# Altium PCB PCB1.pcbdoc
Units mil, origin at the board's own origin, x right, y up, seen from the top; angles counter-clockwise.
Board outline 1570.77 x 933.66 mil, 2 copper layers (Top Layer, Bottom Layer); 11 components, 16 nets, 89 pads, 38 vias.
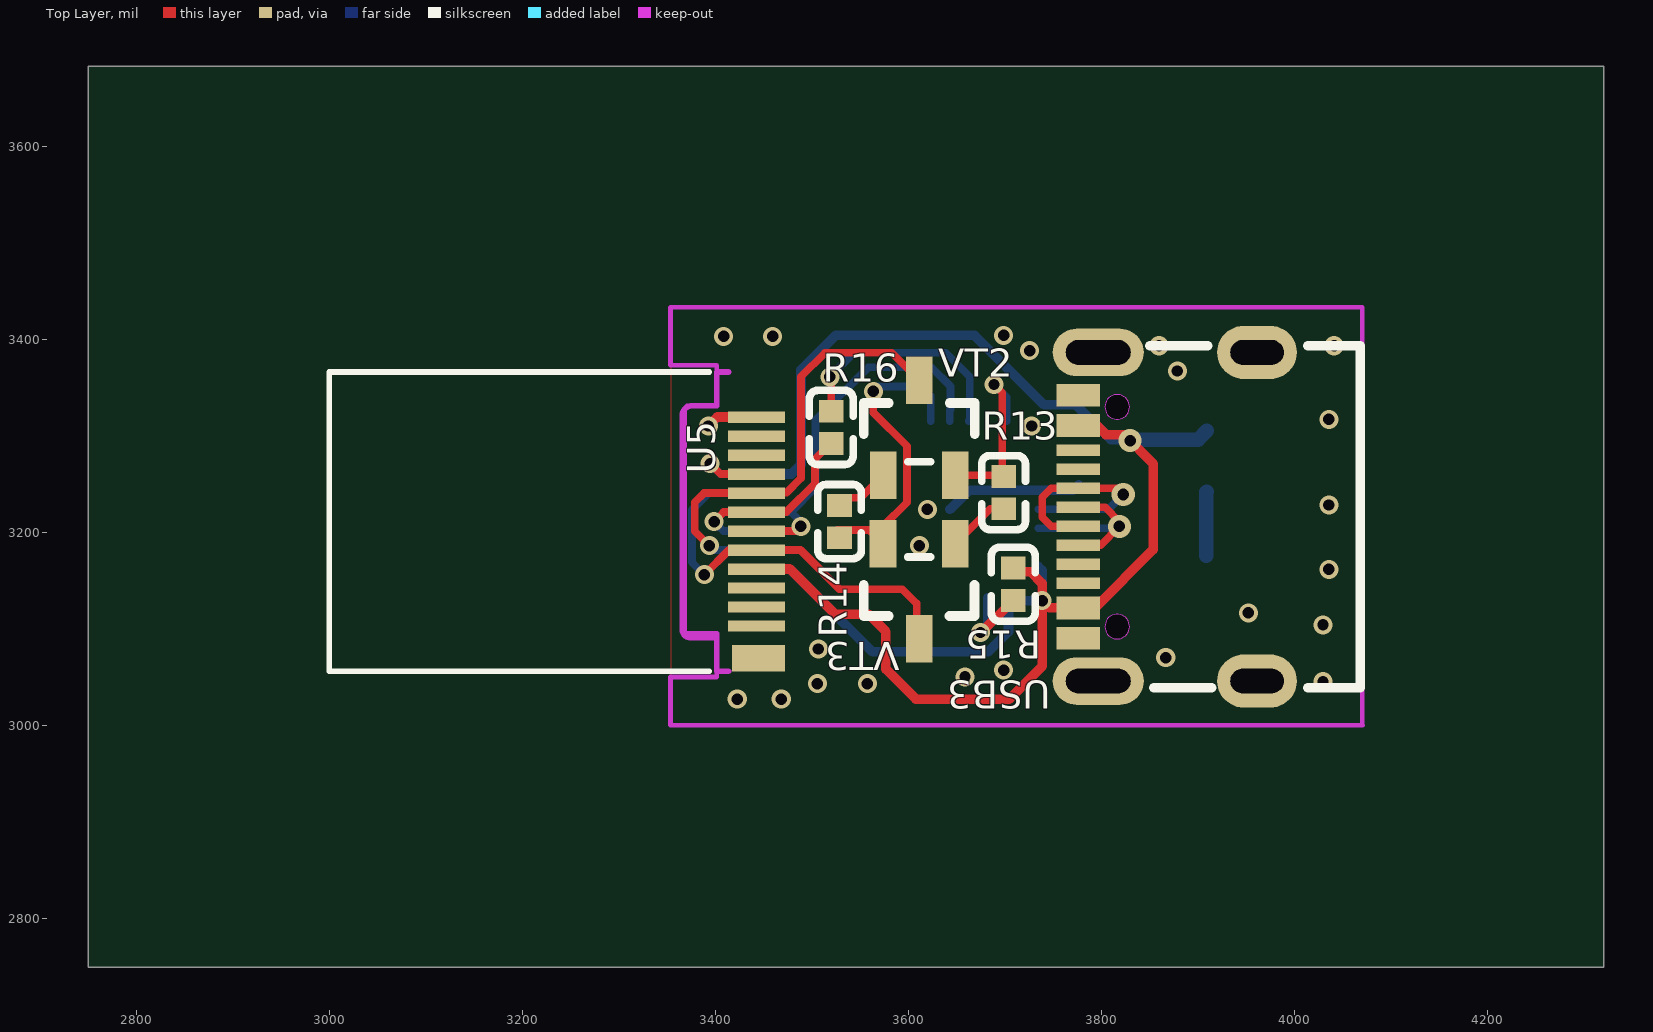
[diagram p0: Top Layer view]
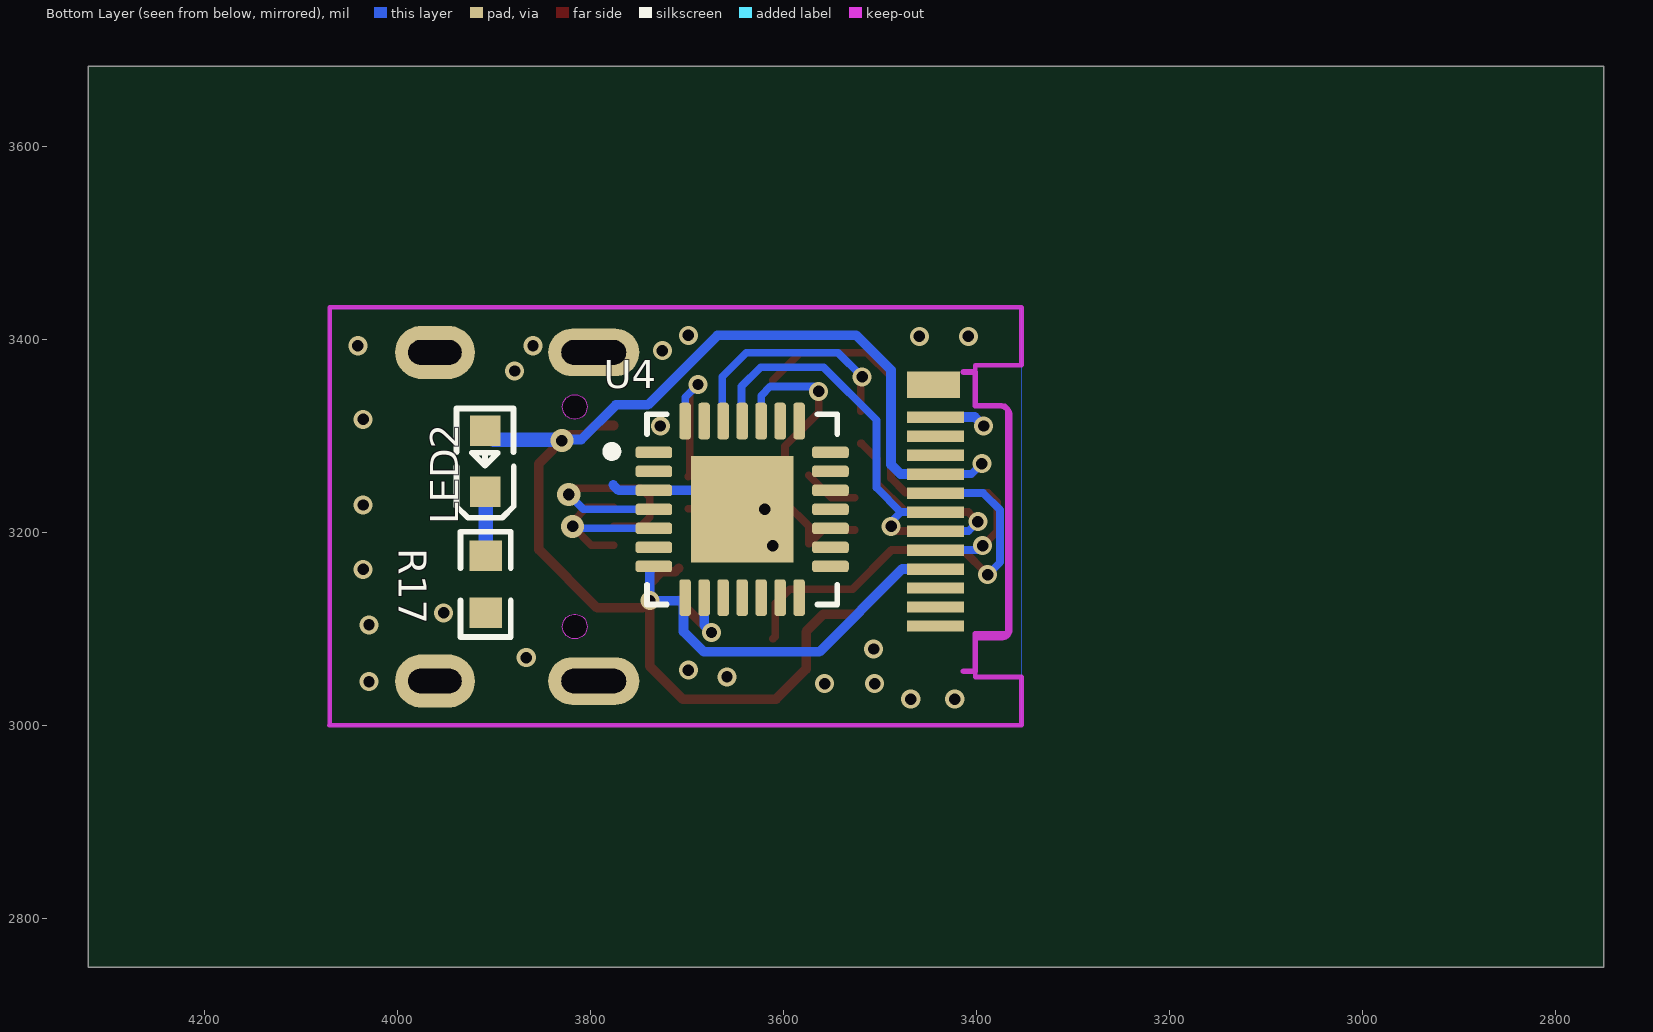
[diagram p1: Bottom Layer view, seen from below]

## Layer stack, top to bottom
Top Layer: signal copper (thickness not stored)
Dielectric: dielectric 12.6, FR-4, Dk 4.8
Bottom Layer: signal copper (thickness not stored)

## Board outline
4320.77,2750 2750,2750 2750,3683.66 4320.77,3683.66

## Components (designator, comment, footprint, x,y, rotation, side; value= is the part's Value field where it differs from the comment)
LED2 "LED_0603-R" LED_0603 3909.51,3276.18 r90 bottom
R13 "10K" C-0402 3698.7,3241.66 r270 top
R14 "10K" C-0402 3528.7,3211.66 r90 top
R15 "10K" C-0402 3708.7,3146.66 r270 top
R16 "200R" C-0402 3520.12,3309.18 r90 top
R17 "Res_0603" R0603 3908.7,3146.66 r270 bottom
U4 "CP2102" QFN28 3644.51,3224.31 r180 bottom
U5 "TYPE-C 24P-GTJB 040" USB-C-SMD_TYPE-C-24P-GTJB-040 3443.7,3211.66 r270 top
USB3 "TYPE-C16P3MDDGP073" USB-SMD_TYPE-C16PIN-1 3868.7,3216.66 r90 top
VT2 "S8050" SOT-233 3613.7,3301.66 r0 top
VT3 "S8050" SOT-233 3608.7,3146.66 r180 top

## Footprints (in the part's own frame and the unit in brackets; to place one, negate y for a bottom-side part, rotate by r counter-clockwise, add the part's x,y. Pads: shape width x height; smd on the part's side, far side on the other; paste and mask are expansions set on the pad)
C-0402 [mm]
  rect 0.6x0.65 smd: 1(-0.425,0) 2(0.425,0)
  silkscreen extent -0.97,-0.58 0.98,0.58
LED_0603 [mil]
  rect 31.5x31.5 smd: 1(-33.5,-0.4) 2(29.5,-0.2)
  silkscreen extent -61,-30 53,30
QFN28 [mil]
  rrect50% 38x12 smd: 1(-90,59.06) 2(-90,39.37) 3(-90,19.68) 4(-90,0) 5(-90,-19.68) 6(-90,-39.37) 7(-90,-59.06) 15(93,-59.06) 16(93,-39.37) 17(93,-19.68) 18(93,0) 19(93,19.68) 20(93,39.37) 21(93,59.06)
  rrect50% 12x38 smd: 8(-57.56,-91.5) 9(-37.87,-91.5) 10(-18.18,-91.5) 11(1.5,-91.5) 12(21.18,-91.5) 13(40.87,-91.5) 14(60.56,-91.5) 22(60.56,91.5) 23(40.87,91.5) 24(21.18,91.5) 25(1.5,91.5) 26(-18.18,91.5) 27(-37.87,91.5) 28(-57.56,91.5)
  rect 106.3x110.24 smd: 29(1.5,0)
  silkscreen extent -138,-99 100,99
R0603 [mil]
  rect 31.75x34.02 smd: 1(-29.66,0) 2(29.66,0)
  silkscreen extent -55,-26 55,26
SOT-233 [mm]
  rect 0.7x1.25 smd: 1(-1.011,-1.067) 2(0.889,-1.067) 3(-0.061,1.433)
  silkscreen extent -1.52,-0.72 1.4,0.83
USB-C-SMD_TYPE-C-24P-GTJB-040 [mm]
  rect 0.7x1.4 smd: 25(3.6,0.025)
  rect 0.7x1.4 smd far side: 26(-3.6,0.025)
  rect 0.3x1.5 smd: A1(2.75,-0.025) A2(2.25,-0.025) A3(1.75,-0.025) A4(1.25,-0.025) A5(0.75,-0.025) A6(0.25,-0.025) A7(-0.25,-0.025) A8(-0.75,-0.025) A9(-1.25,-0.025) A10(-1.75,-0.025) A11(-2.25,-0.025) A12(-2.75,-0.025)
  rect 0.3x1.5 smd far side: B1(-2.75,-0.025) B2(-2.25,-0.025) B3(-1.75,-0.025) B4(-1.25,-0.025) B5(-0.75,-0.025) B6(-0.25,-0.025) B7(0.25,-0.025) B8(0.75,-0.025) B9(1.25,-0.025) B10(1.75,-0.025) B11(2.25,-0.025) B12(2.75,-0.025)
  Board Outline Layer lines w0.15: 2.86,-1.975 -2.741,-1.975 2.86,-1.975 ; 2.86,-1.975 ccw(c2.86,-1.785) 3.05,-1.785 ; 2.86,-1.975 ccw(c2.86,-1.785) 3.05,-1.785 ; 3.05,-1.785 3.05,-1.075 ; 3.05,-1.785 3.05,-1.075 ; -3.05,-1.719 ccw(c-2.794,-1.719) -2.794,-1.975 cw(c-2.794,-1.719) -3.05,-1.719 ; -3.05,-1.719 -3.05,-1.7 ; -3.05,-1.719 -3.05,-1.7 ; -3.05,-1.7 -3.05,-1.075 ; -3.05,-1.7 -3.05,-1.075 ; 3.937,-1.075 3.05,-1.075 ; 3.937,-1.075 3.937,-0.762 3.937,-1.075 ; 3.937,-1.075 3.05,-1.075 ; -3.05,-1.075 -3.937,-1.075 ; -3.05,-1.075 -3.937,-1.075 ; -3.937,-1.075 -3.937,-0.762 -3.937,-1.075
  silkscreen extent -3.94,-11.27 3.94,-1.27
USB-SMD_TYPE-C16PIN-1 [mm]
  oval 1.25x2.4 hole 0.65 slot 1.7 at 90 deg: 17(-4.325,1.828) 18(4.325,1.828)
  oval 1.4x2.1 hole 0.65 slot 1.4 at 90 deg: 19(-4.325,-2.353) 20(4.325,-2.353)
  rect 0.6x1.15 smd: A1B12(-3.2,2.353) A4B9(-2.4,2.353) B1A12(3.2,2.353) B4A9(2.4,2.353)
  rect 0.3x1.15 smd: A5(-1.25,2.353) A6(-0.25,2.353) A7(0.25,2.353) A8(1.25,2.353) B5(1.75,2.353) B6(0.75,2.353) B7(-0.75,2.353) B8(-1.75,2.353)
  Multi-Layer board cut-out: 2.89,1.003 3.031,1.035 3.144,1.125 3.207,1.255 3.207,1.4 3.144,1.53 3.031,1.621 2.89,1.653 2.89,1.653 2.749,1.621 2.636,1.53 2.573,1.4 2.573,1.255 2.636,1.125 2.749,1.035 2.89,1.003
  Multi-Layer board cut-out: -2.89,1.003 -2.749,1.035 -2.636,1.125 -2.573,1.255 -2.573,1.4 -2.636,1.53 -2.749,1.621 -2.89,1.653 -2.89,1.653 -3.031,1.621 -3.144,1.53 -3.207,1.4 -3.207,1.255 -3.144,1.125 -3.031,1.035 -2.89,1.003
  Multi-Layer keep-out region: 2.89,1.003 3.031,1.035 3.144,1.125 3.207,1.255 3.207,1.4 3.144,1.53 3.031,1.621 2.89,1.653 2.89,1.653 2.749,1.621 2.636,1.53 2.573,1.4 2.573,1.255 2.636,1.125 2.749,1.035 2.89,1.003
  Multi-Layer keep-out region: -2.89,1.003 -2.749,1.035 -2.636,1.125 -2.573,1.255 -2.573,1.4 -2.636,1.53 -2.749,1.621 -2.89,1.653 -2.89,1.653 -3.031,1.621 -3.144,1.53 -3.207,1.4 -3.207,1.255 -3.144,1.125 -3.031,1.035 -2.89,1.003
  silkscreen extent -4.5,-5.07 4.5,0.47

## Via types
v1: diameter 19.7, hole 11.8, Top Layer to Bottom Layer, 30 vias
v2: diameter 19.68, hole 11.81, Top Layer to Bottom Layer, 4 vias
v3: diameter 24.02, hole 12.01, Top Layer to Bottom Layer, 3 vias
v4: diameter 19.68, hole 12.01, Top Layer to Bottom Layer, 1 vias

## Nets (pads, with @x,y where several pads share a name; then routed paths per layer and width w, separated by ;. In a path a pad name is that pad's centre, name@x,y a point inside that pad or via, vN(x,y) a via of type N, cw(c..) or ccw(c..) an arc to the next point about the centre after c; other vN are vias at no path point)
$1N369: R16.2 U4.26 | length 248.2
  Top Layer w8: v4(3518.7,3361.66) 3520.12,3360.25 R16.2
  Bottom Layer w8: v4(3518.7,3361.66) 3543.7,3386.66 3638.7,3386.66 3663.54,3361.82 3663.54,3316.66 U4.26
$1N375: R15.2 U4.9 | length 87.1
  Top Layer w10: v1(3674.7,3096.66) 3675.43,3096.66 R15.2
  Bottom Layer w10: v1(3674.7,3096.66) 3682.38,3104.34 U4.9
$1N379: R13.2 VT3.1 | length 65.2
  Top Layer w8: VT3.1 3684.77,3224.93 R13.2
$1N381: R14.2 VT2.1 | length 57.1
  Top Layer w8: R14.2@3526.43,3236.35 3550.59,3236.35 VT2.1
$1N1088: LED2.1 R17.1 | length 66.5
  Bottom Layer w15: R17.1 3908.7,3242.28 LED2.1
DTR: R13.1 U4.28 VT2.2 | length 191.5
  Top Layer w8: VT2.2 R13.1@3697.43,3259.66 ; v1(3688.7,3353.66) 3697.43,3344.93 R13.1@3697.43,3259.66 ; R13.1 R13.1@3697.43,3259.66
  Bottom Layer w8: v1(3688.7,3353.66) 3702.06,3340.3 U4.28
GND: R17.2 U4.3 U4.29 U5.A1 U5.A12 U5.B1 U5.B12 USB3.17 USB3.18 USB3.19 USB3.20 USB3.A1B12 USB3.B1A12 | length 251.9
  Top Layer w10: v1(3392.7,3310.66) 3401.97,3319.93 U5.A12
  Bottom Layer w10: v1(3392.7,3310.66) 3401.97,3319.93 U5.B1 ; U4.29 3662.69,3244 U4.3 3771.04,3244 3776.7,3249.66
  other v1: 3422.7,3027.66 3468.29,3027.66 3505.7,3043.66 3557.56,3043.66 4029.7,3045.7 3658.7,3050.66 3698.7,3057.66 3866.7,3070.66 3506.7,3079.66 4029.7,3104.66 3952.2,3117 4035.7,3162.23 3611.3,3186.64 3619.59,3224.23 4035.7,3228.82 3727.7,3310.66 4035.7,3317.66 3878.7,3367.66 3725.7,3388.66 3859.66,3393.83 4041.14,3393.83 3408.7,3403.66 3459.29,3403.66 3698.7,3404.66
GPIO0: U5.A8 U5.B8 VT2.3 | length 472.3
  Top Layer w8: v2(3393.7,3186.66) 3378.7,3201.66 3378.7,3231.66 3388.23,3241.19 U5.A8 3443.19,3241.66 3473.7,3241.66 3488.7,3256.66 3488.7,3361.66 3513.7,3386.66 3582.7,3386.66 VT2.3
  Bottom Layer w8: v2(3393.7,3186.66) 3398.23,3182.14 U5.B8
REST: U5.A5 U5.B5 VT3.3 | length 437.6
  Top Layer w8: v1(3388.7,3156.66) 3414.18,3182.14 U5.A5 3488.23,3182.14 3528.7,3141.66 3593.7,3141.66 3608.7,3126.66 3608.7,3092.66 VT3.3
  Bottom Layer w8: v1(3388.7,3156.66) 3375.7,3169.66 3375.7,3223.66 3393.23,3241.19 U5.B5
RTS: R14.1 U4.24 VT3.2 | length 327.9
  Top Layer w8: R14.1@3526.43,3202.89 3559.48,3202.89 VT3.2 3573.7,3206.66 3598.7,3231.66 3598.7,3289.66 3563.7,3324.66 v2(3563.7,3346.66)
  Bottom Layer w8: v2(3563.7,3346.66) 3568.7,3351.66 3613.7,3351.66 3623.32,3342.04 U4.24
U0RX: R16.1 U5.A7 U5.B7 | length 217.8
  Top Layer w8: v2(3398.7,3211.66) 3408.55,3221.51 U5.A7 3442.87,3221.66 3473.7,3221.66 3503.32,3251.28 3503.32,3276.64 3519.13,3292.45 R16.1
  Bottom Layer w8: v2(3398.7,3211.66) 3408.55,3201.82 U5.B7
U0TX: U4.25 U5.A6 U5.B6 | length 415.7
  Top Layer w8: U5.A6 3483.86,3201.82 v2(3488.7,3206.66)
  Bottom Layer w8: U5.B6 3478.55,3221.51 ; v2(3488.7,3206.66) 3488.7,3211.35 3478.55,3221.51 ; U4.25 3643.01,3327.13 3643.7,3327.82 3643.7,3351.66 3623.7,3371.66 3558.7,3371.66 3503.7,3316.66 3503.7,3246.66 3478.55,3221.51
USB-PWR-DM: U4.5 USB3.A7 USB3.B7 | length 189.5
  Top Layer w8: USB3.B7 3799.17,3187.13 v3(3818.7,3206.66) 3818.7,3211.66 3803.86,3226.5 USB3.A7
  Bottom Layer w8: U4.5 3816.67,3204.63 v3(3818.7,3206.66)
USB-PWR-DP: U4.4 USB3.A6 USB3.B6 | length 246.9
  Top Layer w8: USB3.A6 3748.05,3206.82 3738.7,3216.17 3738.7,3236.66 3748.23,3246.19 USB3.B6 3816.17,3246.19 v3(3822.7,3239.66)
  Bottom Layer w8: U4.4 3807.35,3224.31 v3(3822.7,3239.66)
VDD_5V: LED2.2 R15.1 U4.7 U4.8 U5.A4 U5.A9 U5.B4 U5.B9 USB3.A4B9 USB3.B4A9 | length 1989.9
  Top Layer w8: v1(3394.7,3271.66) 3405.49,3260.88 U5.A9
  Top Layer w10: U5.A4 3477.24,3162.45 3524.03,3115.66 3558.7,3115.66 3576.7,3097.66 3576.7,3058.66 3607.7,3027.66 3704.7,3027.66 3738.7,3061.66 v1(3738.7,3129.66) ; R15.1 3712.43,3159.66 3726.58,3159.66 3738.7,3147.54 v1(3738.7,3129.66) ; USB3.B4A9 3795.32,3311.15 3804.81,3301.66 3823.7,3301.66 3853.7,3271.66 3853.7,3182.7 3793.17,3122.17 USB3.A4B9 3746.19,3122.17 v1(3738.7,3129.66)
  Bottom Layer w8: v1(3394.7,3271.66) 3405.49,3260.88 U5.B4 ; v3@3828.7,3296.66 v3(3829.81,3295.55)
  Bottom Layer w10: U5.B9 3477.24,3162.45 3563.03,3076.66 3682.7,3076.66 3703.7,3097.66 U4.8@3703.7,3131.18 ; U5.B4 3478.92,3260.88 3488.7,3270.66 3488.7,3368.66 3524.7,3404.66 3668.7,3404.66 3740.7,3332.66 3773.7,3332.66 3809.7,3296.66 v3@3828.7,3296.66 ; U4.8 U4.8@3703.7,3131.18 ; U4.7 3738.7,3161.06 v1(3738.7,3129.66) 3705.21,3129.66 U4.8@3703.7,3131.18
  Bottom Layer w15: v3@3828.7,3296.66 3900.28,3296.66 LED2.2
"": U4.1 U4.2 U4.6 U4.10 U4.11 U4.12 U4.13 U4.14 U4.15 U4.16 U4.17 U4.18 U4.19 U4.20 U4.21 U4.22 U4.23 U4.27 U5.25 U5.26 U5.A2 U5.A3 U5.A10 U5.A11 U5.B2 U5.B3 U5.B10 U5.B11 USB3.A5 USB3.A8 USB3.B5 USB3.B8

## Polygon pours and split planes (outlines as drawn)
GND on Top Layer (solid, remove dead copper, pour order 0): 3353.7,3001 4070.36,3001 4070.36,3433.66 3353.7,3433.66
GND on Bottom Layer (solid, remove dead copper, pour order 1): 3353.7,3000 4070.36,3000 4070.36,3432.66 3353.7,3432.66

## Keep-outs
Board Outline Layer:
  lines w5 net "": 3353.7,3000.59 4070.77,3000.59 4070.36,3001 4070.36,3433.66 3353.7,3433.66 3353.7,3373.66 3401.38,3373.66 3401.38,3331.74 3370.78,3331.74 3368.14,3329.1 3368.14,3095.66 3401.7,3095.66 3401.38,3089.34 3401.38,3050.66 3353.7,3050.66 3353.7,3000.59